# Altium PCB SLAVE_BOARD_r1.PcbDoc
Units mm, origin at the board's own origin, x right, y up, seen from the top; angles counter-clockwise.
Board outline 85.75 x 75.98 mm, 2 copper layers (Top Layer, Bottom Layer); 68 components, 70 nets, 241 pads, 26 vias.
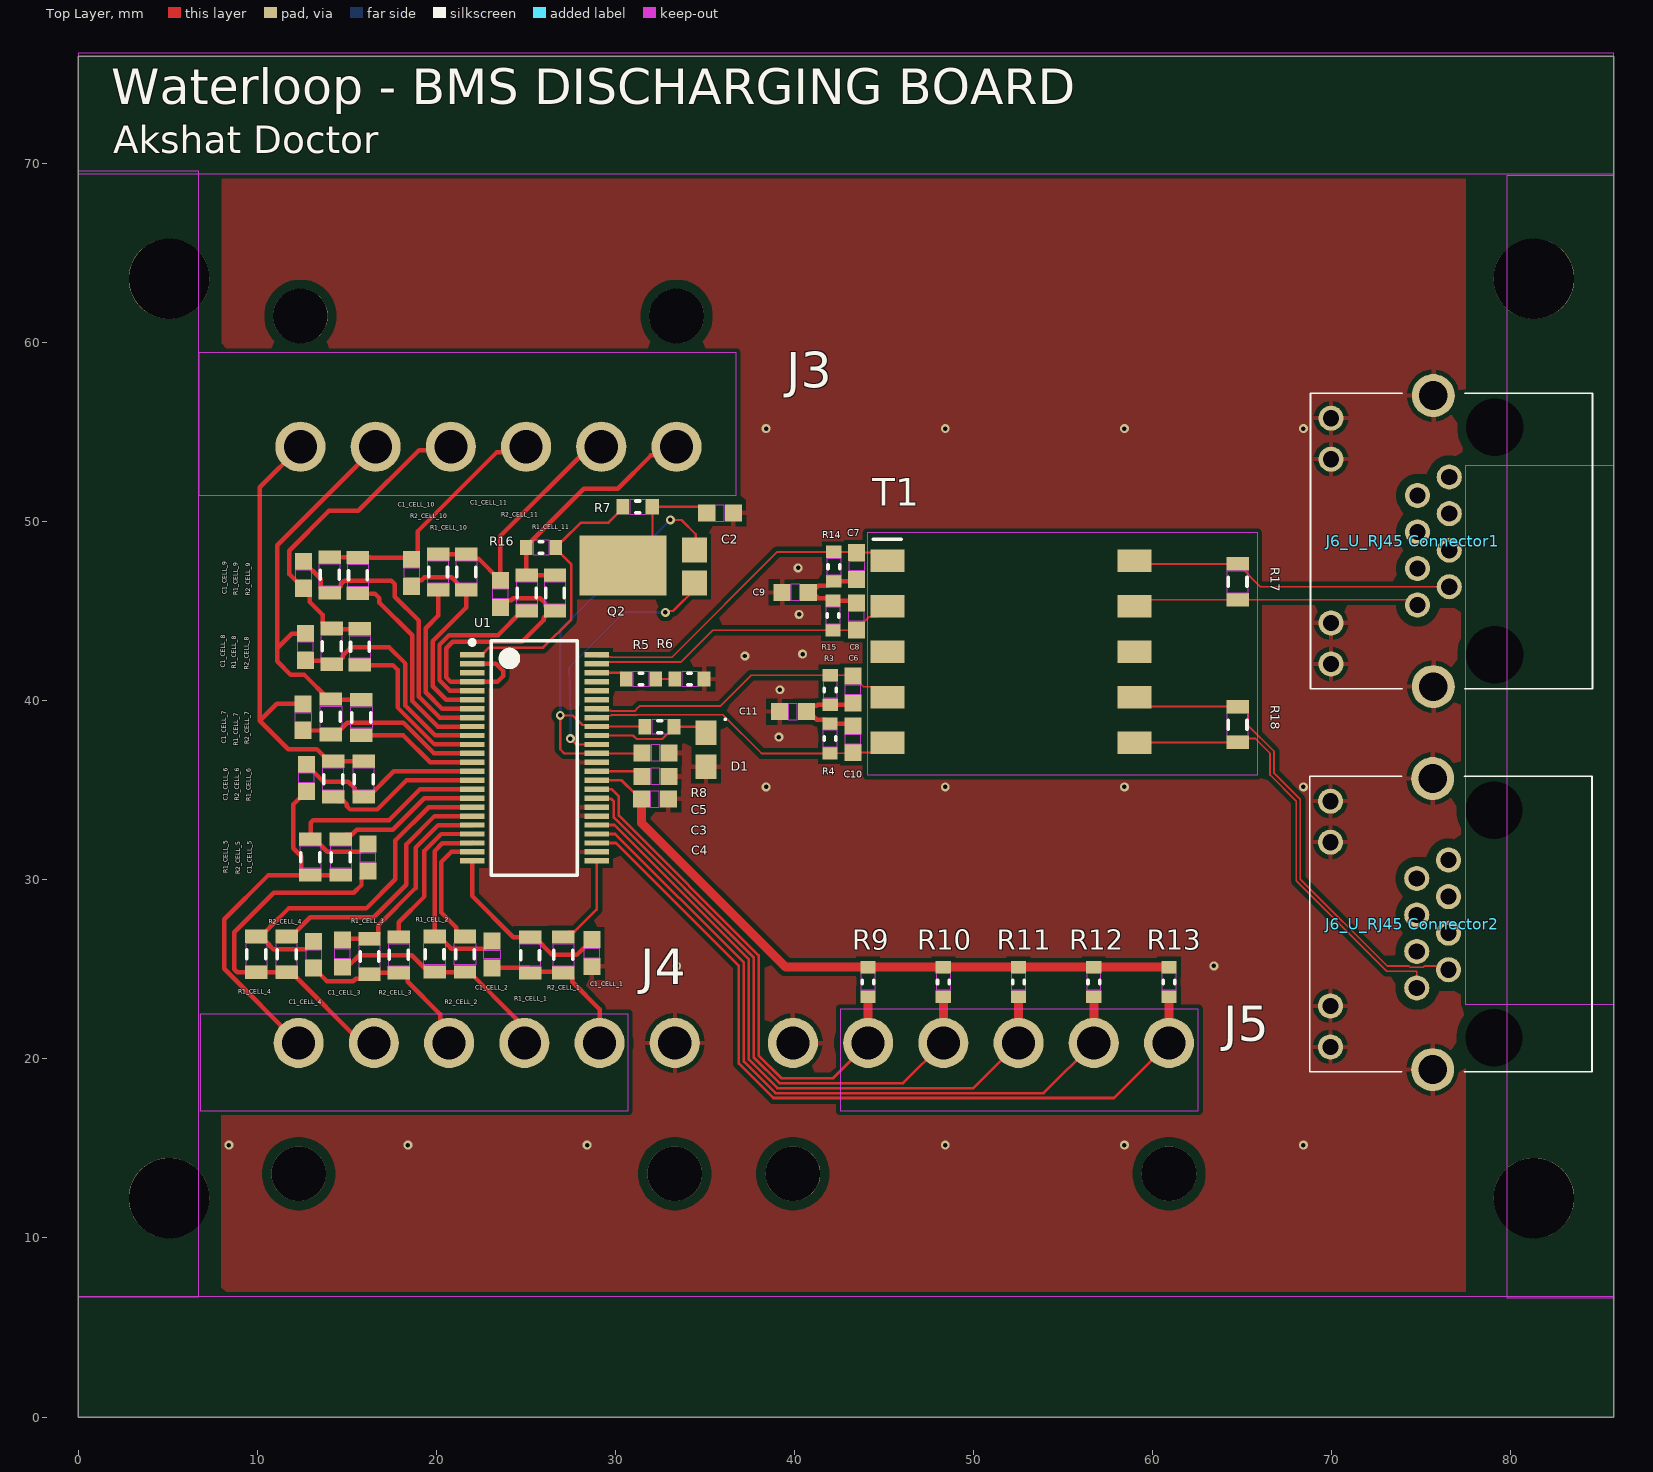
[diagram p0: Top Layer view]
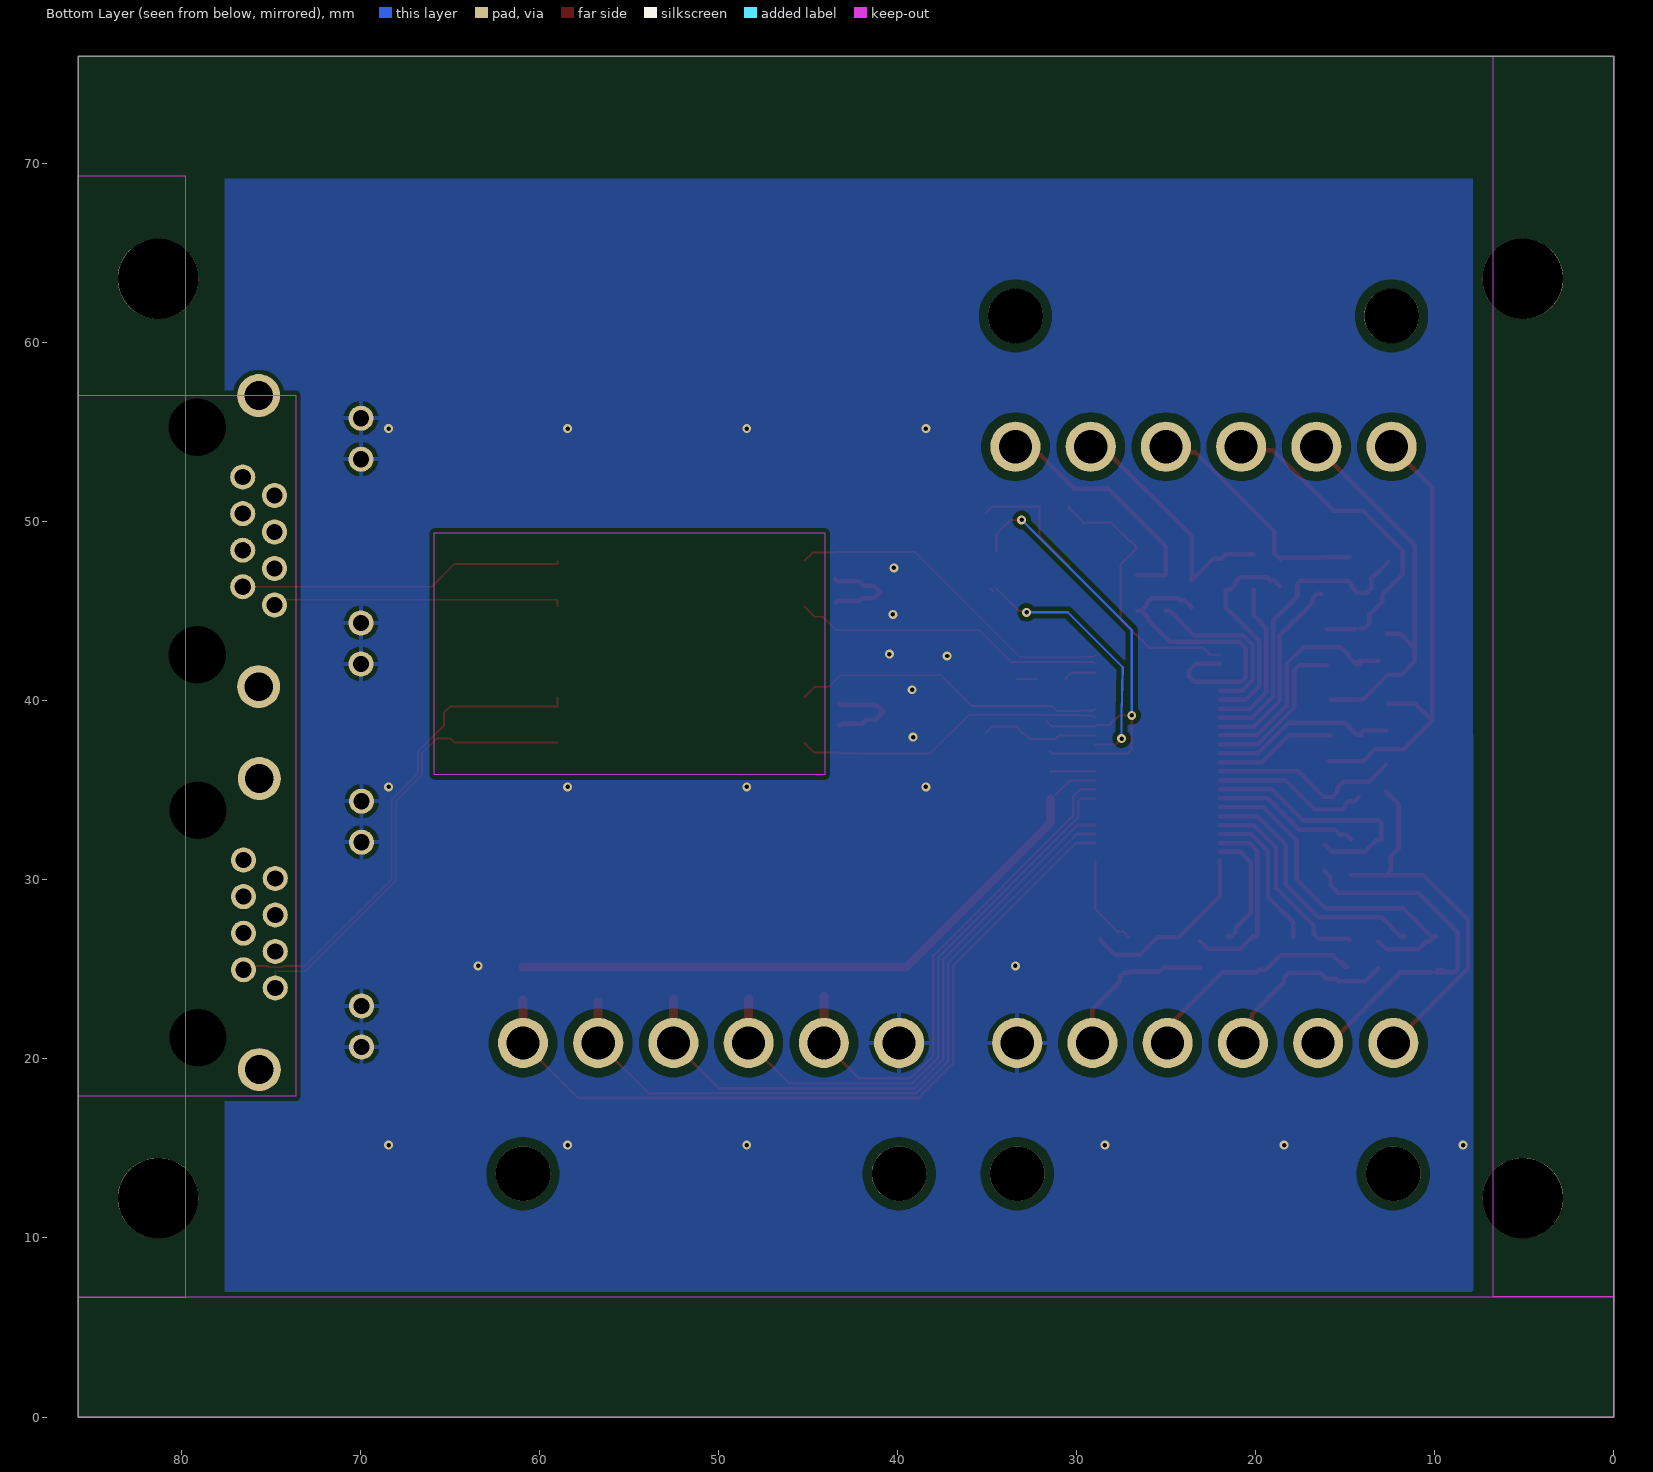
[diagram p1: Bottom Layer view, seen from below]
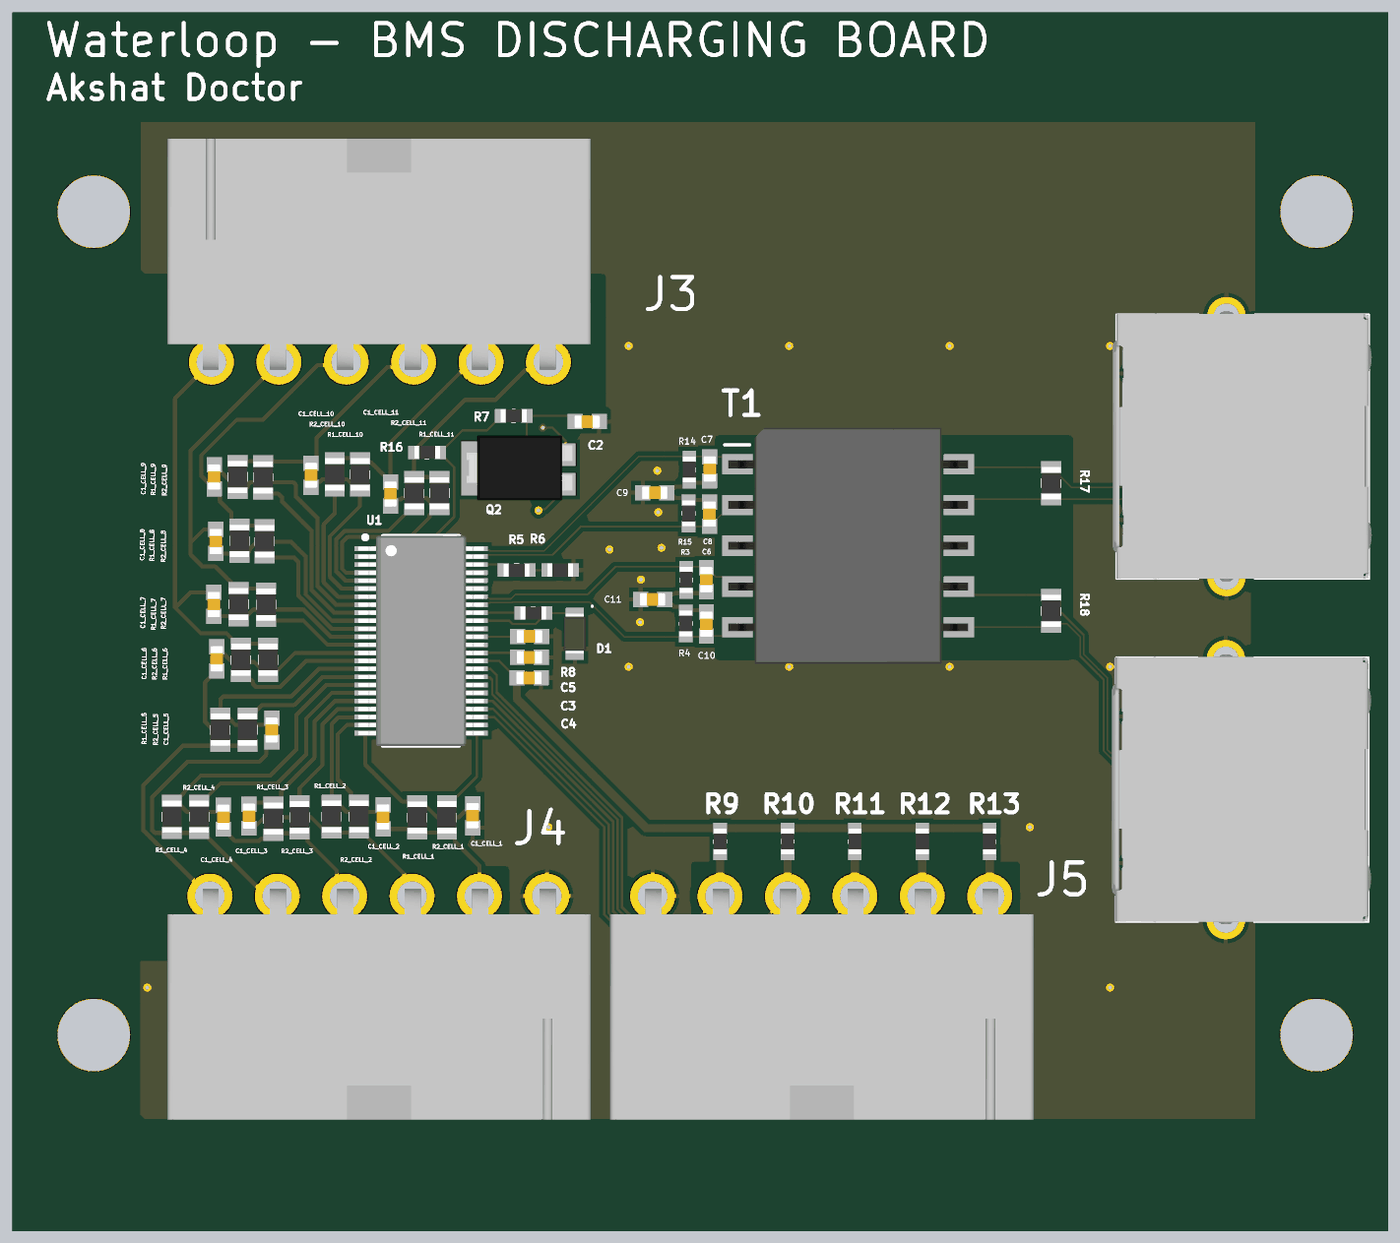
[diagram p2: 3D render of the assembled board from above, using the file's embedded part models]

## Layer stack, top to bottom
Top Solder: solder mask 0.0102, Solder Resist, Dk 3.5
Top Layer: signal copper 0.035
Dielectric 1: dielectric 0.32, FR-4, Dk 4.8
Bottom Layer: signal copper 0.035
Bottom Solder: solder mask 0.0102, Solder Resist, Dk 3.5

## Board outline
0,0 0,75.984 85.746,75.984 85.746,0

## Design rules (kind name [scope] priority, off if disabled: settings)
Clearance [All] p1: gap=0.127 ignorepadtopadclearanceinfootprint=FALSE except(0.2: Track-SMDPad; 0.254: Track-Via SMDPad-Via Via-Via; 0.5: SMDPad-THPad THPad-THPad; 0.508: THPad-Poly)
Creepage [InNet('C0')] p1: checkdistance=0.254 applytopolygonpour=TRUE
DiffPairsRouting [All] p1: maxlimit=0.127 minlimit=0.127 mostfreqgap=0.127 toplayer_minwidth=0.1 toplayer_maxwidth=0.1 toplayer_prefwidth=0.1 bottomlayer_minwidth=0.1 bottomlayer_maxwidth=0.1 bottomlayer_prefwidth=0.1 impedanceprofiledriven=TRUE impedanceprofileid={BA6CB40C-7046-4E80-8CDD-D62923715936} impedanceprofilevalue=120.000000 maxuncoupledlength=12.7
HoleSize [All] p1: absolutevalues=TRUE maxlimit=6.3 minlimit=0.2 maxpercent=80.000 minpercent=20.000
MinimumSolderMaskSliver [All] p1: minsoldermaskwidth=0.2
PlaneConnect [All] p1: pad.planeconnectstyle=Relief pad.reliefexpansion=0.508 pad.reliefentries=4 pad.reliefconductorwidth=0.254 pad.reliefairgap=0.254 via.planeconnectstyle=Direct via.reliefexpansion=0.508 via.reliefentries=4 via.reliefconductorwidth=0.254 via.reliefairgap=0.254
PolygonConnect [All] p1: thpad.connectstyle=Relief thpad.reliefconductorwidth=0.254 thpad.reliefentries=4 thpad.polygonreliefangle="90 Angle" thpad.airgapwidth=0.254 smdpad.connectstyle=Relief smdpad.reliefconductorwidth=0.254 smdpad.reliefentries=4 smdpad.polygonreliefangle="90 Angle" smdpad.airgapwidth=0.254 via.connectstyle=Direct via.reliefconductorwidth=0.254 via.reliefentries=4 via.polygonreliefangle="90 Angle" via.airgapwidth=0.254
RoomDefinition Chip [InComponentClass('Chip')] p1: confinementstyle=ConfineIn formatcopy=TRUE lockcomponents=FALSE outline 18.021,22.391 63.121,22.391 63.121,52.521 18.021,52.521
RoomDefinition CELL_9 [InComponentClass('CELL_9')] p2: confinementstyle=ConfineIn formatcopy=FALSE lockcomponents=FALSE outline 17.442,48.669 11.658,48.669 11.658,45.294 17.442,45.294
RoomDefinition CELL_4 [InComponentClass('CELL_4')] p3: confinementstyle=ConfineIn formatcopy=FALSE lockcomponents=FALSE outline 13.864,24.033 9.114,24.033 9.114,27.493 13.864,27.493
RoomDefinition CELL_10 [InComponentClass('CELL_10')] p4: confinementstyle=ConfineIn formatcopy=TRUE lockcomponents=FALSE outline 23.143,49.031 17.422,49.031 17.422,45.256 23.143,45.256
RoomDefinition CELL_6 [InComponentClass('CELL_6')] p5: confinementstyle=ConfineIn formatcopy=FALSE lockcomponents=FALSE outline 11.651,37.421 16.773,37.421 16.773,33.961 11.651,33.961
RoomDefinition CELL_2 [InComponentClass('CELL_2')] p6: confinementstyle=ConfineIn formatcopy=FALSE lockcomponents=FALSE outline 23.821,24.047 19.071,24.047 19.071,27.507 23.821,27.507
RoomDefinition CELL_11 [InComponentClass('CELL_11')] p7: confinementstyle=ConfineIn formatcopy=TRUE lockcomponents=FALSE outline 28.095,47.86 22.374,47.86 22.374,44.085 28.095,44.085
RoomDefinition CELL_7 [InComponentClass('CELL_7')] p8: confinementstyle=ConfineIn formatcopy=FALSE lockcomponents=FALSE outline 17.907,40.755 11.88,40.755 11.88,37.231 17.907,37.231
RoomDefinition CELL_3 [InComponentClass('CELL_3')] p9: confinementstyle=ConfineIn formatcopy=FALSE lockcomponents=FALSE outline 13.357,24 19.077,24 19.077,27.775 13.357,27.775
RoomDefinition CELL_5 [InComponentClass('CELL_5')] p10: confinementstyle=ConfineIn formatcopy=FALSE lockcomponents=FALSE outline 17.222,29.658 12.066,29.658 12.066,33.087 17.222,33.087
RoomDefinition CELL_8 [InComponentClass('CELL_8')] p11: confinementstyle=ConfineIn formatcopy=FALSE lockcomponents=FALSE outline 12,44.606 12.015,44.588 12.015,41.151 16.665,41.151 16.695,41.187 16.695,44.654
RoomDefinition CELL_1 [InComponentClass('CELL_1')] p12: confinementstyle=ConfineIn formatcopy=FALSE lockcomponents=FALSE outline 24.167,23.999 29.888,23.999 29.888,27.774 24.167,27.774
RoutingVias [All] p1: holewidth=0.711 width=1.27 viastyle="Through Hole" minholewidth=0.711 minwidth=1.27 maxholewidth=0.711 maxwidth=1.27
SolderMaskExpansion [All] p1: expansion=0 istentingtop=FALSE
Width [All] p1: maxlimit=1 minlimit=0.127 preferedwidth=0.5
26 further rules are at their usual default settings.

## Classes and differential pairs
component class U_Transformer_Stage: C6 C7 C8 C9 C10 C11 R3 R4 R14 R15 T1
channel class "RJ45 Connector": "U_RJ45 Connector1" "U_RJ45 Connector2"
component class "U_RJ45 Connector2": "J6_U_RJ45 Connector2"
component class CELL_11: C1_CELL_11 R1_CELL_11 R2_CELL_11
component class CELL_10: C1_CELL_10 R1_CELL_10 R2_CELL_10
component class CELL_9: C1_CELL_9 R1_CELL_9 R2_CELL_9
component class CELL_8: C1_CELL_8 R1_CELL_8 R2_CELL_8
component class CELL_7: C1_CELL_7 R1_CELL_7 R2_CELL_7
component class CELL_6: C1_CELL_6 R1_CELL_6 R2_CELL_6
component class CELL_5: C1_CELL_5 R1_CELL_5 R2_CELL_5
component class CELL_4: C1_CELL_4 R1_CELL_4 R2_CELL_4
component class CELL_3: C1_CELL_3 R1_CELL_3 R2_CELL_3
component class CELL_2: C1_CELL_2 R1_CELL_2 R2_CELL_2
component class CELL_1: C1_CELL_1 R1_CELL_1 R2_CELL_1
component class "U_RJ45 Connector1": "J6_U_RJ45 Connector1"
channel class "Cell Balancing": CELL_1 CELL_2 CELL_3 CELL_4 CELL_5 CELL_6 CELL_7 CELL_8 CELL_9 CELL_10 CELL_11
component class "Monitoring IC": J3 J4 J5 R17 R18
component class Chip: C2 C3 C4 C5 D1 Q2 R5 R6 R7 R8 R9 R10 R11 R12 R13 R16 U1
differential pair PRI2: +PRI2_P -PRI2_N
differential pair PRI1: +PRI1_P -PRI1_N
differential pair ISO2: +ISO2_P -ISO2_N
differential pair ISO1: +ISO1_P -ISO1_N

## Components (designator, comment, footprint, x,y, rotation, side; value= is the part's Value field where it differs from the comment)
C1_CELL_1 "Capacitor - Nonpolarized" "0603 - Capacitor" 28.688,25.899 r90 top value=10n (schematic designator C1)
C1_CELL_2 "Capacitor - Nonpolarized" "0603 - Capacitor" 23.11,25.826 r90 top value=10n (schematic designator C1)
C1_CELL_3 "Capacitor - Nonpolarized" "0603 - Capacitor" 14.755,25.873 r90 top value=10n (schematic designator C1)
C1_CELL_4 "Capacitor - Nonpolarized" "0603 - Capacitor" 13.153,25.812 r90 top value=10n (schematic designator C1)
C1_CELL_5 "Capacitor - Nonpolarized" "0603 - Capacitor" 16.171,31.242 r90 top value=10n (schematic designator C1)
C1_CELL_6 "Capacitor - Nonpolarized" "0603 - Capacitor" 12.743,35.681 r90 top value=10n (schematic designator C1)
C1_CELL_7 "Capacitor - Nonpolarized" "0603 - Capacitor" 12.561,39.072 r270 top value=10n (schematic designator C1)
C1_CELL_8 "Capacitor - Nonpolarized" "0603 - Capacitor" 12.683,42.999 r270 top value=10n (schematic designator C1)
C1_CELL_9 "Capacitor - Nonpolarized" "0603 - Capacitor" 12.583,47.016 r90 top value=10n (schematic designator C1)
C1_CELL_10 "Capacitor - Nonpolarized" "0603 - Capacitor" 18.622,47.131 r270 top value=10n (schematic designator C1)
C1_CELL_11 "Capacitor - Nonpolarized" "0603 - Capacitor" 23.574,45.96 r270 top value=10n (schematic designator C1)
C2 "Capacitor - Nonpolarized" "0603 - Capacitor" 35.829,50.468 r180 top value=0.1uF
C3 "Capacitor - Nonpolarized" "0603 - Capacitor" 32.227,35.771 r180 top value=1uF
C4 "Capacitor - Nonpolarized" "0603 - Capacitor" 32.202,34.496 r180 top value=1uF
C5 "Capacitor - Nonpolarized" "0603 - Capacitor" 32.237,37.08 r180 top value=1uF
C6 "Capacitor - Nonpolarized" "0603 - Capacitor" 43.257,40.616 r270 top value=100pF
C7 "Capacitor - Nonpolarized" "0603 - Capacitor" 43.463,47.517 r270 top value=100pF
C8 "Capacitor - Nonpolarized" "0603 - Capacitor" 43.448,44.705 r270 top value=100pF
C9 "Capacitor - Nonpolarized" "0603 - Capacitor" 40.041,46.041 r180 top value=10n
C10 "Capacitor - Nonpolarized" "0603 - Capacitor" 43.257,37.846 r270 top value=100pF
C11 "Capacitor - Nonpolarized" "0603 - Capacitor" 39.907,39.38 r180 top value=10n
D1 "LED" "0805 - DIODE" 35.066,37.256 r270 top
J3 "6 pin MOLEX" 1726480106 33.411,54.176 r180 top
J4 "6 pin MOLEX" 1726480106 12.313,20.886 r0 top
J5 "6 pin MOLEX" 1726480106 39.908,20.886 r0 top
"J6_U_RJ45 Connector1" "MTJ-88ARX1-FSM-LV" MTJ-88ARX1-FSM-LV 76.81,49.177 r90 top (schematic designator J6)
"J6_U_RJ45 Connector2" "MTJ-88ARX1-FSM-LV" MTJ-88ARX1-FSM-LV 76.773,27.793 r90 top (schematic designator J6)
Q2 "TRANS NPN 160V 0.6A POWERDI5" DXT5551P5 34.404,46.568 r90 top
R1_CELL_1 "Resistor" "0805 - Resistor" 25.237,25.793 r270 top value=100 (schematic designator R1)
R1_CELL_2 "Resistor" "0805 - Resistor" 19.902,25.847 r270 top value=100 (schematic designator R1)
R1_CELL_3 "Resistor" "0805 - Resistor" 16.266,25.714 r270 top value=100 (schematic designator R1)
R1_CELL_4 "Resistor" "0805 - Resistor" 9.945,25.833 r270 top value=100 (schematic designator R1)
R1_CELL_5 "Resistor" "0805 - Resistor" 12.963,31.263 r270 top value=100 (schematic designator R1)
R1_CELL_6 "Resistor" "0805 - Resistor" 15.942,35.621 r90 top value=100 (schematic designator R1)
R1_CELL_7 "Resistor" "0805 - Resistor" 14.105,39.09 r90 top value=100 (schematic designator R1)
R1_CELL_8 "Resistor" "0805 - Resistor" 14.157,43.032 r90 top value=100 (schematic designator R1)
R1_CELL_9 "Resistor" "0805 - Resistor" 14.046,47.016 r90 top value=100 (schematic designator R1)
R1_CELL_10 "Resistor" "0805 - Resistor" 21.672,47.181 r90 top value=100 (schematic designator R1)
R1_CELL_11 "Resistor" "0805 - Resistor" 26.624,46.01 r90 top value=100 (schematic designator R1)
R2_CELL_1 "Resistor" "0805 - Resistor" 27.088,25.801 r270 top value=75 (schematic designator R2)
R2_CELL_2 "Resistor" "0805 - Resistor" 21.602,25.847 r270 top value=75 (schematic designator R2)
R2_CELL_3 "Resistor" "0805 - Resistor" 17.903,25.8 r270 top value=75 (schematic designator R2)
R2_CELL_4 "Resistor" "0805 - Resistor" 11.645,25.833 r270 top value=75 (schematic designator R2)
R2_CELL_5 "Resistor" "0805 - Resistor" 14.663,31.263 r270 top value=75 (schematic designator R2)
R2_CELL_6 "Resistor" "0805 - Resistor" 14.242,35.621 r90 top value=75 (schematic designator R2)
R2_CELL_7 "Resistor" "0805 - Resistor" 15.813,39.057 r90 top value=75 (schematic designator R2)
R2_CELL_8 "Resistor" "0805 - Resistor" 15.732,43.007 r90 top value=75 (schematic designator R2)
R2_CELL_9 "Resistor" "0805 - Resistor" 15.621,46.99 r90 top value=75 (schematic designator R2)
R2_CELL_10 "Resistor" "0805 - Resistor" 20.097,47.181 r90 top value=75 (schematic designator R2)
R2_CELL_11 "Resistor" "0805 - Resistor" 25.049,46.01 r90 top value=75 (schematic designator R2)
R3 "Resistor" "0603 - Resistor" 41.993,40.598 r270 top value=49.9
R4 "Resistor" "0603 - Resistor" 41.974,37.884 r90 top value=49.9
R5 "Resistor" "0603 - Resistor" 31.425,41.211 r180 top value=3k
R6 "Resistor" "0603 - Resistor" 34.144,41.214 r180 top value=1k
R7 "Resistor" "0603 - Resistor" 31.245,50.82 r0 top value=100
R8 "Resistor" "0603 - Resistor" 32.47,38.541 r180 top value=220
R9 "Resistor" "0603 - Resistor" 44.108,24.295 r90 top value=10k
R10 "Resistor" "0603 - Resistor" 48.308,24.295 r90 top value=10k
R11 "Resistor" "0603 - Resistor" 52.508,24.295 r90 top value=10k
R12 "Resistor" "0603 - Resistor" 56.708,24.295 r90 top value=10k
R13 "Resistor" "0603 - Resistor" 60.908,24.295 r90 top value=10k
R14 "Resistor" "0603 - Resistor" 42.194,47.479 r270 top value=49.9
R15 "Resistor" "0603 - Resistor" 42.147,44.75 r90 top value=49.9
R16 "Resistor" "0603 - Resistor" 25.852,48.548 r0 top value=10
R17 "Resistor" "0805 - Resistor" 64.738,46.63 r90 top value=DNP
R18 "Resistor" "0805 - Resistor" 64.738,38.665 r270 top value=DNP
T1 "HM2100NLT" HM2100NLT 52.092,42.73 r270 top
U1 "LTC6811HG-1#3ZZTRPBF" LTC6811-1 25.476,36.803 r0 top

## Footprints (in the part's own frame and the unit in brackets; to place one, negate y for a bottom-side part, rotate by r counter-clockwise, add the part's x,y. Pads: shape width x height; smd on the part's side, far side on the other; paste and mask are expansions set on the pad)
"0603 - Capacitor" [mm] "0603 Chip Capacitor - IPC Medium Density"
  rect 0.95x0.95 smd: 1(-0.75,0) 2(0.75,0)
  Top Layer keep-out region: -0.25,0.45 -0.25,-0.45 0.25,-0.45 0.25,0.45
  body extent -0.8,-0.4 0.8,0.4, height 0.8
"0603 - Resistor" [mm] "0603 Chip Resistor - IPC Medium Density"
  rect 0.7x0.85 smd: 1(-0.825,0) 2(0.825,0)
  Top Layer keep-out region: -0.45,0.4 -0.45,-0.4 0.45,-0.4 0.45,0.4
  silkscreen extent -0.1,-0.33 0.1,0.33, body extent -0.8,-0.4 0.8,0.4, height 0.45
"0805 - DIODE" [mm] "Diode"
  rect 1.35x1.15 smd: 1(-0.948,-0.009) 2(0.952,-0.009)
  silkscreen extent -1.75,1.02 -1.65,1.12, body extent -1.29,-0.71 1.3,0.69, height 1.2
"0805 - Resistor" [mm] "0805 Chip Resistor - IPC Medium Density"
  rect 0.75x1.25 smd: 1(-1,0) 2(1,0)
  Top Layer keep-out region: -0.6,0.6 -0.6,-0.6 0.6,-0.6 0.6,0.6
  silkscreen extent -0.25,-0.53 0.25,0.53, body extent -1,-0.6 1,0.6, height 0.5
1726480106 [mm]
  round 2.8 hole 1.85 mask+0.07: 1(0,0) 2(4.2,0) 3(8.4,0) 4(12.6,0) 5(16.8,0) 6(21,0)
  round 3.05 hole 3.05 mask+0.07: 7(0,-7.3) 8(21,-7.3)
  body extent -2.65,-13.93 23.75,0.47, height 6.81
DXT5551P5 [mm]
  rect 1.39x1.4 smd mask+0.07: B(0,0) E(1.84,0)
  rect 3.36x4.86 smd mask+0.07: C(0.985,3.982)
  body extent -1.01,-0.51 3.04,6.09, height 1.16
HM2100NLT [mm]
  rect 1.27x1.89 smd: 1(-5.08,-6.895) 2(-2.54,-6.895) 3(0,-6.895) 4(2.54,-6.895) 5(5.08,-6.895) 6(5.08,6.895) 7(2.54,6.895) 8(0,6.895) 9(-2.54,6.895) 10(-5.08,6.895)
  silkscreen extent -6.29,-7.69 -6.29,-6.14, body extent -7.35,-7.48 7.35,7.48, height 3.2
LTC6811-1 [mm]
  rect 1.37x0.3 smd: 1(-3.475,5.75) 2(-3.475,5.25) 3(-3.475,4.75) 4(-3.475,4.25) 5(-3.475,3.75) 6(-3.475,3.25) 7(-3.475,2.75) 8(-3.475,2.25) 9(-3.475,1.75) 10(-3.475,1.25) 11(-3.475,0.75) 12(-3.475,0.25) 13(-3.475,-0.25) 14(-3.475,-0.75) 15(-3.475,-1.25) 16(-3.475,-1.75) 17(-3.475,-2.25) 18(-3.475,-2.75) 19(-3.475,-3.25) 20(-3.475,-3.75) 21(-3.475,-4.25) 22(-3.475,-4.75) 23(-3.475,-5.25) 24(-3.475,-5.75) 25(3.475,-5.75) 26(3.475,-5.25) 27(3.475,-4.75) 28(3.475,-4.25) 29(3.475,-3.75) 30(3.475,-3.25) 31(3.475,-2.75) 32(3.475,-2.25) 33(3.475,-1.75) 34(3.475,-1.25) 35(3.475,-0.75) 36(3.475,-0.25) 37(3.475,0.25) 38(3.475,0.75) 39(3.475,1.25) 40(3.475,1.75) 41(3.475,2.25) 42(3.475,2.75) 43(3.475,3.25) 44(3.475,3.75) 45(3.475,4.25) 46(3.475,4.75) 47(3.475,5.25) 48(3.475,5.75)
  silkscreen extent -3.6,-6.55 2.4,6.57, body extent -3.9,-6.55 3.9,6.55, height 2
MTJ-88ARX1-FSM-LV [mm] "RJ45 Connector"
  round 1.4 hole 0.9: 1(3.302,0.254) 2(2.282,2.034) 3(1.262,0.254) 4(0.242,2.034) 5(-0.778,0.254) 6(-1.798,2.034) 7(-2.818,0.254) 8(-3.838,2.034) 9(6.592,6.854) 10(4.302,6.854) 11(-4.838,6.854) 12(-7.128,6.854)
  round 2.4 hole 1.6: MH1(7.857,1.144) MH2(-8.393,1.144)
  round 1.6 hole 3.2 unplated: MH3(6.082,-2.286) MH4(-6.618,-2.286)
  silkscreen extent -8.52,-7.75 7.98,8, body extent -8.65,-7.91 8.15,8.26, height 12.95

## Part data
C1_CELL_1 C1_CELL_2 C1_CELL_3 C1_CELL_4 C1_CELL_5 C1_CELL_6 C1_CELL_7 C1_CELL_8 C1_CELL_9 C1_CELL_10 C1_CELL_11 C2 C3 C4 C5 C6 C7 C8 C9 C10 C11: "Nonpolarized Capacitor"
D1: "Light Emitting Diode"
J3 J4 J5: library part MOLEX1726480106, "1x6 MOLEX MiniFit Jr. Connector"
"J6_U_RJ45 Connector1" "J6_U_RJ45 Connector2": "RJ45 Connector"
Q2: library part DXT5551P5-13, "Bipolar (BJT) Transistor NPN 160 V 600 mA 130MHz 2.25 W Surface Mount PowerDI™ 5"
T1: "Pulse Transformer 1:1 Surface Mount 150µH, 450µH", Manufacturer="Pulse Electronics", Supplier Part Number=1840-1032-1-ND, ComponentLink1Description=Datasheet, ComponentLink1URL=https://productfinder.pulseeng.com/doc_type/WEB301/doc_num/HM2100NL/doc_part/HM2100NL.pdf, Manufacturer Part Number=HM2100NLT, Supplier=Digikey
U1: "Multicell Battery Balancer 5.7V Automotive 48-Pin SSOP T/R", Manufacturer="Analog Devices / Linear Technology", Analog IC - Other Type="POWER SUPPLY MANAGEMENT CIRCUIT", Category="Battery Management", ComponentLink1Description=https://datasheet.ciiva.com:443/pdfs/VipMasterIC/IC/LITC/LITC-S-A0003389121/LITC-S-A0003389121-1.pdf?src-supplier=IHS+Markit, ComponentLink1URL=https://www.analog.com/media/en/technical-documentation/data-sheets/LTC6811-1-6811-2.pdf, Manufacturer Part Number=LTC6811HG-1#3ZZTRPBF, Pricing 1="1=21.45000, 10=19.72000, 25=18.91000, 50=18.91000, 100=18.91000, 111=16.65000, 1000=16.65000, 10000=16.65000 (USD)", Pricing 2="1=22.70000, 10=20.93000, 50=20.00000, 100=17.88000, 1000=16.64000, 10000=16.64000 (USD)", REACH SVHC=Yes, RoHS=Yes, RoHS Compliant=Yes, Supplier 1=Mouser, Supplier 2=Mouser, Supplier Part Number 2=584-6811HG-1#3ZZTRPB

## Free pads (board coordinates)
  round 4.5 hole 4.5 mask+0.07: 1(5.08,12.224) 2(81.28,12.224) 3(81.28,63.553) 4(5.08,63.553)

## Via types
v1: diameter 0.5, hole 0.25, Top Layer to Bottom Layer, 23 vias
v2: diameter 0.5, hole 0.25, Top Layer to Bottom Layer, tented both sides, 3 vias

## Nets (pads, with @x,y where several pads share a name; then routed paths per layer and width w, separated by ;. In a path a pad name is that pad's centre, name@x,y a point inside that pad or via, vN(x,y) a via of type N, cw(c..) or ccw(c..) an arc to the next point about the centre after c; other vN are vias at no path point)
C0: "J6_U_RJ45 Connector1.9" "J6_U_RJ45 Connector1.10" "J6_U_RJ45 Connector1.11" "J6_U_RJ45 Connector1.12" "J6_U_RJ45 Connector1.MH1" "J6_U_RJ45 Connector1.MH2" "J6_U_RJ45 Connector2.9" "J6_U_RJ45 Connector2.10" "J6_U_RJ45 Connector2.11" "J6_U_RJ45 Connector2.12" "J6_U_RJ45 Connector2.MH1" "J6_U_RJ45 Connector2.MH2" C1_CELL_1.1 C2.1 C3.1 C4.1 C5.1 C9.2 C11.2 D1.2 J4.6 J5.1 R6.1 U1.26 U1.30 U1.31 U1.36
  other v1: 8.415,15.186 18.415,15.186 28.415,15.186 48.415,15.186 58.415,15.186 68.415,15.186 33.415,25.186 63.415,25.186 38.415,35.186 48.415,35.186 58.415,35.186 68.415,35.186 39.123,37.965 39.176,40.608 37.222,42.492 40.453,42.601 40.257,44.821 40.198,47.409 38.415,55.186 48.415,55.186 58.415,55.186 68.415,55.186
C1: C1_CELL_1.2 R1_CELL_1.1 U1.24 | length 10.4
  Top Layer w0.25: U1.24 22.001,29.094 24.302,26.793 R1_CELL_1.1 25.487,26.793 26.478,25.801 27.84,25.801 C1_CELL_1.2
C1_+: C1_CELL_2.1 J4.5 R1_CELL_1.2 R2_CELL_1.2 | length 9
  Top Layer w0.25: C1_CELL_2.1@23.104,25.081 C1_CELL_2.1 25.161,25.076 25.388,24.849 R2_CELL_1.2@27.088,24.849 ; R2_CELL_1.2 27.338,24.801 27.588,24.551 27.588,24.301 29.113,22.776 J4.5
C2: C1_CELL_2.2 R1_CELL_2.1 U1.22 | length 10.7
  Top Layer w0.25: U1.22 21.976,32.028 21.318,32.028 20.336,32.028 19.902,31.594 R1_CELL_2.1 20.152,26.847 20.648,26.351 20.648,26.335 20.841,26.143 22.676,26.143 C1_CELL_2.2
C2_+: C1_CELL_3.1 J4.4 R1_CELL_2.2 R2_CELL_2.2 | length 13.3
  Top Layer w0.25: C1_CELL_3.1@15.192,25.352 15.105,25.352 14.88,25.127 15.043,25.127 15.703,25.787 18.629,25.787 19.444,24.972 19.777,24.972 R1_CELL_2.2 20.152,24.847 R2_CELL_2.2 21.852,24.847 24.425,22.274 24.425,21.374 J4.4
C3: C1_CELL_3.2 R1_CELL_3.1 U1.20 | length 11.5
  Top Layer w0.25: C1_CELL_3.2 14.845,26.714 R1_CELL_3.1 16.516,26.714 16.766,26.964 16.766,27.46 18.84,29.534 18.84,31.79 20.104,33.053 U1.20
C3_+: C1_CELL_4.1 J4.3 R1_CELL_3.2 R2_CELL_3.2 | length 10.5
  Top Layer w0.25: C1_CELL_4.1 13.892,24.323 15.365,24.323 15.505,24.464 16.087,24.464 16.424,24.8 R2_CELL_3.2 18.153,24.8 18.403,24.55 18.403,24.3 20.225,22.478 20.225,21.374 J4.3
C4: C1_CELL_4.2 R1_CELL_4.1 U1.18 | length 19.9
  Top Layer w0.25: R1_CELL_4.1 R1_CELL_4.1@10.008,26.833 ; C1_CELL_4.2 12.72,26.129 10.884,26.129 10.691,26.322 10.691,26.337 10.495,26.533 10.308,26.533 R1_CELL_4.1@10.008,26.833 ; U1.18 19.569,34.053 17.706,32.191 17.706,30.02 16.084,28.397 11.75,28.397 10.695,27.343 10.695,27.333 10.195,26.833 R1_CELL_4.1@10.008,26.833
C4_+: C1_CELL_5.1 J4.2 R1_CELL_4.2 R2_CELL_4.2 | length 20.9
  Top Layer w0.25: R1_CELL_4.2@9.57,24.958 9.82,24.958 R1_CELL_4.2 8.881,24.833 8.719,24.995 8.719,27.067 10.926,29.273 15.39,29.273 15.821,29.704 15.821,30.142 C1_CELL_5.1 ; R1_CELL_4.2@10.195,24.833 R2_CELL_4.2 11.895,24.833 15.843,20.886 J4.2
C5: C1_CELL_5.2 R1_CELL_5.1 U1.16 | length 14.4
  Top Layer w0.25: R1_CELL_5.1 R1_CELL_5.1@12.981,32.263 ; C1_CELL_5.2 15.738,31.559 13.902,31.559 13.709,31.752 13.709,31.767 13.213,32.263 R1_CELL_5.1@12.981,32.263 ; U1.16 19.089,35.053 17.367,33.332 13.128,33.332 12.981,33.185 R1_CELL_5.1@12.981,32.263
C5_+: C1_CELL_6.1 J4.1 R1_CELL_5.2 R2_CELL_5.2 | length 21.4
  Top Layer w0.25: J4.1 12.295,20.886 8.158,25.023 8.158,27.796 10.625,30.263 R1_CELL_5.2@12.713,30.263 ; C1_CELL_6.1 12.013,34.201 12.013,31.753 12.463,31.303 12.463,30.513 R1_CELL_5.2@12.713,30.263 ; R2_CELL_5.2 R1_CELL_5.2 R1_CELL_5.2@12.713,30.263
C6: C1_CELL_6.2 R1_CELL_6.1 U1.14 | length 10.7
  Top Layer w0.25: C1_CELL_6.2 13.698,35.476 15.087,35.476 15.442,35.121 15.442,34.871 15.692,34.621 R1_CELL_6.1 16.192,34.621 17.624,36.053 U1.14
C6_+: C1_CELL_7.1 J3.6 R1_CELL_6.2 R2_CELL_6.2 | length 25.8
  Top Layer w0.25: J3.6 10.143,51.909 10.143,38.873 ; C1_CELL_7.1 11.092,39.822 10.143,38.873 ; R1_CELL_6.2 R2_CELL_6.2 13.992,36.621 13.335,37.277 11.739,37.277 10.143,38.873
C7: C1_CELL_7.2 R1_CELL_7.1 U1.12 | length 10.4
  Top Layer w0.25: C1_CELL_7.2@12.716,38.332 13.566,38.332 13.988,38.332 R1_CELL_7.1@14.168,38.153 ; R1_CELL_7.1 14.355,38.09 15.022,38.757 18.162,38.757 19.866,37.053 U1.12
C7_+: C1_CELL_8.1 J3.5 R1_CELL_7.2 R2_CELL_7.2 | length 21.8
  Top Layer w0.25: C1_CELL_8.1 12.672,43.737 11.927,43.737 11.11,42.919 ; R2_CELL_7.2 14.263,40.057 14.238,40.082 13.988,40.082 12.638,41.432 11.874,41.432 11.11,42.197 11.11,42.919 ; J3.5 11.11,48.675 11.11,42.919
C8: C1_CELL_8.2 R1_CELL_8.1 U1.10 | length 12.9
  Top Layer w0.25: C1_CELL_8.2@13.121,42.237 14.226,42.237 R1_CELL_8.1@14.294,42.169 ; R1_CELL_8.1 14.407,42.032 14.782,42.407 14.782,42.516 15.253,42.987 17.361,42.987 18.276,42.072 18.276,39.709 19.932,38.053 U1.10
C8_+: C1_CELL_9.1 J3.4 R1_CELL_8.2 R2_CELL_8.2 | length 18.5
  Top Layer w0.25: R1_CELL_8.2 13.907,44.032 13.657,44.282 13.657,44.782 12.933,45.507 12.933,45.916 C1_CELL_9.1 11.783,47.066 11.783,48.375 14.004,50.596 15.647,50.596 19.036,53.985 20.62,53.985 J3.4 ; R1_CELL_8.2@14.45,44.013 14.476,43.987 R2_CELL_8.2@16.025,43.987
C9: C1_CELL_9.2 R1_CELL_9.1 U1.8 | length 16.9
  Top Layer w0.25: C1_CELL_9.2 13.546,46.802 13.546,46.266 13.796,46.016 R1_CELL_9.1 14.296,46.016 14.671,46.391 14.671,46.5 14.861,46.69 17.495,46.69 17.676,46.509 17.676,45.808 19.03,44.454 19.03,40.217 20.193,39.053 U1.8
C9_+: C1_CELL_10.1 J3.3 R1_CELL_9.2 R2_CELL_9.2 | length 13.6
  Top Layer w0.25: 14.75,47.996 16.299,47.996 16.324,47.971 18.532,47.971 C1_CELL_10.1 18.972,48.231 18.972,49.468 23.382,53.878 24.712,53.878 J3.3
C10: C1_CELL_10.2 R1_CELL_10.1 U1.6 | length 12.3
  Top Layer w0.25: C1_CELL_10.2 18.972,46.731 19.188,46.731 19.338,46.881 20.857,46.881 21.172,46.565 21.172,46.431 21.422,46.181 R1_CELL_10.1 21.672,45.198 19.8,43.325 19.8,40.811 20.557,40.053 U1.6
C10_+: C1_CELL_11.1 J3.2 R1_CELL_10.2 R2_CELL_10.2 | length 14.3
  Top Layer w0.25: R2_CELL_10.2 R1_CELL_10.2 21.922,47.931 22.353,47.931 C1_CELL_11.1 23.574,49.189 28.562,54.176 J3.2
C11: C1_CELL_11.2 R1_CELL_11.1 U1.2 U1.4 | length 17.6
  Top Layer w0.25: U1.2 23.328,42.053 23.723,41.659 23.723,41.365 23.411,41.053 U1.4 20.793,41.053 20.554,41.293 20.554,42.925 20.911,43.282 24.781,43.282 25.999,44.5 25.999,44.635 R1_CELL_11.1@26.374,45.01 ; C1_CELL_11.2 23.974,45.61 24.184,45.61 24.288,45.714 25.81,45.714 26.074,45.45 26.074,45.31 R1_CELL_11.1@26.374,45.01 ; R1_CELL_11.1 R1_CELL_11.1@26.374,45.01
C11_+: J3.1 R1_CELL_11.2 R2_CELL_11.2 R16.1 | length 13.9
  Top Layer w0.25: R1_CELL_11.2@26.629,47.014 R1_CELL_11.2 R2_CELL_11.2 25.027,47.032 R16.1 25.027,48.623 28.231,51.828 30.123,51.828 31.984,53.689 32.923,53.689 J3.1
GPIO1: J5.2 R9.1 U1.33 | length 29.1
  Top Layer w0.15: U1.33 29.783,35.053 30.188,34.648 30.188,33.584 38,25.772 38,20.188 39.271,18.916 42.139,18.916 J5.2
  Top Layer w0.5: J5.2 R9.1
GPIO2: J5.3 R10.1 U1.32 | length 33.2
  Top Layer w0.15: U1.32 28.989,34.516 29.767,34.516 29.911,34.372 29.911,33.469 37.723,25.657 37.723,20.073 39.157,18.639 46.062,18.639 J5.3 ; R10.1@48.251,23.413 R10.1@48.308,23.356
  Top Layer w0.5: J5.3 R10.1@48.308,23.356
GPIO3: J5.4 R11.1 U1.29 | length 36.5
  Top Layer w0.15: U1.29 29.935,33.053 37.446,25.543 37.446,19.959 39.042,18.362 49.985,18.362 J5.4 ; R11.1@52.45,23.413 R11.1@52.508,23.355
  Top Layer w0.5: J5.4 R11.1@52.508,23.355
GPIO4: J5.5 R12.1 U1.28 | length 40.6
  Top Layer w0.15: U1.28 29.983,32.553 37.169,25.367 37.169,19.844 38.927,18.085 53.908,18.085 J5.5 ; R12.1@56.555,23.319 R12.1@56.708,23.166
  Top Layer w0.5: J5.5 R12.1@56.708,23.166
GPIO5: J5.6 R13.1 U1.27 | length 44.8
  Top Layer w0.15: U1.27 30.032,32.053 36.892,25.194 36.892,19.729 38.813,17.808 57.831,17.808 J5.6 ; R13.1@60.833,23.352 R13.1@60.908,23.277
  Top Layer w0.5: J5.6 R13.1@60.908,23.277
ISO1_N: "J6_U_RJ45 Connector1.8" R17.1 T1.9 | length 16.4
  Top Layer w0.1: T1.9 58.987,45.63 R17.1 74.776,45.63 74.776,45.339
ISO1_P: "J6_U_RJ45 Connector1.7" R17.2 T1.10 | length 18.3
  Top Layer w0.1: T1.10 58.987,47.63 R17.2 66.01,46.359 76.556,46.359
ISO2_N: "J6_U_RJ45 Connector2.8" R18.2 T1.6 | length 25.4
  Top Layer w0.1: T1.6 58.987,37.665 R18.2@64.671,37.665 ; R18.2 64.951,37.877 65.737,37.877 66.548,37.067 66.548,35.854 68.013,34.389 68.013,29.94 73.062,24.891 74.739,24.891 74.739,23.955
ISO2_P: "J6_U_RJ45 Connector2.7" R18.1 T1.7 | length 28.1
  Top Layer w0.1: T1.7 58.987,39.665 R18.1 64.988,39.665 65.313,39.34 65.313,38.623 66.775,37.161 66.775,35.949 68.24,34.483 68.24,30.034 73.089,25.185 74.309,25.185 74.375,25.118 75.102,25.118 75.168,25.185 76.519,25.185 76.519,24.975
NetC2_2: C2.2 Q2.C R7.2 | length 7.1
  Top Layer w0.127: Q2.C 30.453,47.553 32.07,49.169 R7.2 34.727,50.82 C2.2
NetC3_2: C3.2 U1.35 | length 2.5
  Top Layer w0.15: U1.35 31.47,36.053 C3.2@31.477,36.046
NetC6_2: C6.2 C10.1 C11.1 R3.2 R4.2 | length 5.5
  Top Layer w0.25: C10.1 43.145,38.709 R4.2 41.749,38.934 41.234,38.934 40.791,39.377 41.141,39.727 41.242,39.727 41.287,39.773 R3.2 43.163,39.773 C6.2
NetC7_2: C7.2 C8.1 C9.1 R14.2 R15.2 | length 5.5
  Top Layer w0.25: C8.1 43.328,45.575 R15.2 42.014,45.708 41.316,45.708 40.966,46.058 41.316,46.408 41.874,46.408 42.119,46.654 R14.2 43.35,46.654 C7.2
"NetJ6_U_RJ45 Connector1_1": "J6_U_RJ45 Connector1.1"
"NetJ6_U_RJ45 Connector1_2": "J6_U_RJ45 Connector1.2"
"NetJ6_U_RJ45 Connector1_3": "J6_U_RJ45 Connector1.3"
"NetJ6_U_RJ45 Connector1_4": "J6_U_RJ45 Connector1.4"
"NetJ6_U_RJ45 Connector1_5": "J6_U_RJ45 Connector1.5"
"NetJ6_U_RJ45 Connector1_6": "J6_U_RJ45 Connector1.6"
"NetJ6_U_RJ45 Connector2_1": "J6_U_RJ45 Connector2.1"
"NetJ6_U_RJ45 Connector2_2": "J6_U_RJ45 Connector2.2"
"NetJ6_U_RJ45 Connector2_3": "J6_U_RJ45 Connector2.3"
"NetJ6_U_RJ45 Connector2_4": "J6_U_RJ45 Connector2.4"
"NetJ6_U_RJ45 Connector2_5": "J6_U_RJ45 Connector2.5"
"NetJ6_U_RJ45 Connector2_6": "J6_U_RJ45 Connector2.6"
NetQ2_B: Q2.B U1.38 | length 14.6
  Top Layer w0.127: v2(27.487,37.883) 27.816,37.553 U1.38 ; v1(32.793,44.928) 32.864,45 33.22,45 34.479,46.258 Q2.B@34.484,46.258 ; Q2.B@34.647,46.095 Q2.B@34.767,46.215
  Bottom Layer w0.127: v2(27.487,37.883) 27.487,39.175 ccw(c26.919,39.175) 27.486,39.188 27.424,41.858 30.495,44.928 v1(32.793,44.928)
NetR5_1: R5.1 R6.2 | length 1.1
  Top Layer w0.127: R5.1@32.298,41.163 R5.1 33.316,41.211 R6.2
NetR5_2: R5.2 U1.46 | length 1.8
  Top Layer w0.127: U1.46 30.313,41.553 30.6,41.267 R5.2
NetR7_1: R7.1 R16.2 U1.1 | length 15.5
  Top Layer w0.15: U1.1 22.536,42.553 22.938,42.955 25.959,42.955 27.54,44.536 27.54,47.61 26.677,48.473 R16.2 26.677,48.623 26.952,48.898 27.027,48.898 28.064,49.936 29.611,49.936 30.42,50.745 R7.1
PRI1_N: C8.2 R15.1 T1.2 U1.47 | length 17.6
  Top Layer w0.1: U1.47 29.051,42.153 33.652,42.153 35.423,43.925 R15.1 43.418,43.925 C8.2 44.177,44.685 44.612,44.685 T1.2
PRI1_P: C7.1 R14.1 T1.1 U1.48 | length 18.9
  Top Layer w0.1: U1.48 29.051,42.453 29.74,42.453 29.776,42.417 33.157,42.417 39.043,48.304 R14.1 43.426,48.304 C7.1 44.74,48.267 T1.1
PRI2_N: C10.2 R4.1 T1.5 U1.41 | length 17.5
  Top Layer w0.1: U1.41 29.051,39.153 29.74,39.153 29.776,39.19 31.166,39.19 31.192,39.216 35.99,39.216 38.157,37.049 41.964,37.049 R4.1 43.219,37.059 C10.2 44.644,37.096 T1.5
PRI2_P: C6.1 R3.1 T1.4 U1.42 | length 17.6
  Top Layer w0.1: U1.42 29.051,39.453 29.74,39.453 29.776,39.417 31.072,39.417 31.252,39.598 31.348,39.694 35.855,39.694 37.584,41.423 R3.1 43.201,41.423 C6.1 43.848,40.775 44.612,40.775 T1.4
S1: R2_CELL_1.1 U1.25 | length 5.2
  Top Layer w0.15: R2_CELL_1.1 27.388,27.101 27.725,27.101 28.951,28.328 U1.25
S2: R2_CELL_2.1 U1.23 | length 6.8
  Top Layer w0.25: R2_CELL_2.1 21.352,26.847 21.102,27.097 21.102,27.347 20.279,28.17 20.279,30.987 20.846,31.553 U1.23
S3: R2_CELL_3.1 U1.21 | length 8.5
  Top Layer w0.25: R2_CELL_3.1 17.903,27.63 19.338,29.066 19.338,31.624 20.268,32.553 U1.21
S4: R2_CELL_4.1 U1.19 | length 14.5
  Top Layer w0.25: R2_CELL_4.1 11.895,26.833 12.964,27.902 16.501,27.902 18.315,29.716 18.315,31.97 19.899,33.553 U1.19
S5: R2_CELL_5.1 U1.17 | length 8.3
  Top Layer w0.25: R2_CELL_5.1 14.913,32.513 15.282,32.513 15.561,32.792 17.561,32.792 19.322,34.553 U1.17
S6: R2_CELL_6.1 U1.15 | length 8.8
  Top Layer w0.25: R2_CELL_6.1 14.492,34.371 14.845,34.371 14.992,34.224 14.992,34.111 15.182,33.921 16.701,33.921 18.334,35.553 U1.15
S7: R2_CELL_7.1 U1.13 | length 6.8
  Top Layer w0.25: R2_CELL_7.1 18.15,38.057 19.654,36.553 U1.13
S8: R2_CELL_8.1 U1.11 | length 9
  Top Layer w0.25: R2_CELL_8.1@16.025,41.987 17.573,41.987 17.834,41.726 17.834,39.618 19.899,37.553 U1.11
S9: R2_CELL_9.1 U1.9 | length 11
  Top Layer w0.25: 16.324,45.971 16.574,45.971 16.824,45.721 16.824,45.471 18.653,43.642 18.653,39.979 20.079,38.553 U1.9
S10: R2_CELL_10.1 U1.7 | length 9
  Top Layer w0.25: R2_CELL_10.1 20.097,44.738 19.407,44.048 19.407,40.464 20.318,39.553 U1.7
S11: R2_CELL_11.1 U1.5 | length 9.7
  Top Layer w0.25: U1.5 20.76,40.553 20.177,41.137 20.177,43.119 20.716,43.659 23.449,43.659 24.799,45.01 R2_CELL_11.1
VREF: C4.2 R9.2 R10.2 R11.2 R12.2 R13.2 U1.34 | length 36.6
  Top Layer w0.15: U1.34 30.345,35.553 C4.2@31.152,34.746
  Top Layer w0.5: C4.2 31.452,33.18 39.512,25.12 R9.2 R10.2 R11.2 R12.2 R13.2
VREG: C5.2 Q2.E R8.2 U1.37 U1.40 | length 27.9
  Top Layer w0.127: C5.2@31.482,37.154 31.381,37.053 U1.37 27.144,37.053 26.919,37.279 v2(26.919,39.175) 27.622,39.175 28.157,38.64 28.865,38.64 U1.40 31.386,38.553 31.672,38.84 R8.2@31.672,38.902 ; v2(33.062,50.086) 33.686,50.086 34.479,49.294 Q2.E@34.479,48.332
  Bottom Layer w0.127: v2(26.919,39.175) 26.919,43.943 v2(33.062,50.086)
WDT: D1.1 R8.1 U1.39 | length 6.7
  Top Layer w0.127: U1.39 30.986,38.053 31.186,37.853 32.607,37.853 32.934,38.18 33.009,38.18 33.295,38.466 R8.1 34.72,38.541 D1.1
pads on no net: "J6_U_RJ45 Connector1.MH3" "J6_U_RJ45 Connector1.MH4" "J6_U_RJ45 Connector2.MH3" "J6_U_RJ45 Connector2.MH4" J3.7 J3.8 J4.7 J4.8 J5.7 J5.8 T1.3 T1.8 U1.3 U1.43 U1.44 U1.45

## Polygon pours and split planes (outlines as drawn)
C0 on Top Layer "GND" (solid, remove dead copper, pour order 2): 8.019,69.144 77.472,69.144 77.472,6.725 7.987,6.725
C0 on Bottom Layer "GND" (solid, remove dead copper, pour order 3): 7.871,69.144 77.564,69.144 77.564,6.725 7.839,6.725

## Keep-outs
Top Layer:
  region: 85.746,23.042 85.746,53.117 77.457,53.117 77.457,23.042
  rectangle: 44.046,35.854 65.855,49.362
  region: 62.552,22.781 42.55,22.781 42.55,17.11 62.552,17.11
  rectangle: 6.736,51.463 36.743,59.424
  rectangle: 6.813,17.11 30.716,22.501
  rectangle: 0,69.416 85.746,76.141
  rectangle: 0,0 85.746,6.725
  rectangle: 0,6.725 6.734,69.554
  rectangle: 79.758,6.667 85.746,69.295
Bottom Layer:
  region: 85.746,17.902 85.746,57.059 73.588,57.059 73.588,17.902
  rectangle: 44.046,35.854 65.855,49.362
  rectangle: 79.758,6.667 85.746,69.295
  rectangle: 0,0 85.746,6.725
  rectangle: 0,6.725 6.734,75.984

## Silkscreen, mask and mechanical layers (free items; w line width, h text height)
Top Overlay:
  text "Waterloop - BMS DISCHARGING BOARD" at 1.849,73.303 h2
  text "Akshat Doctor" at 1.953,70.569 h1.52
Mechanical 1:
  lines w0.254: 6.797,6.871 76.871,6.871 76.871,69.152 6.797,69.152 6.797,6.871